# EAGLE board DashDialV3 (EAGLE 9.6.2)
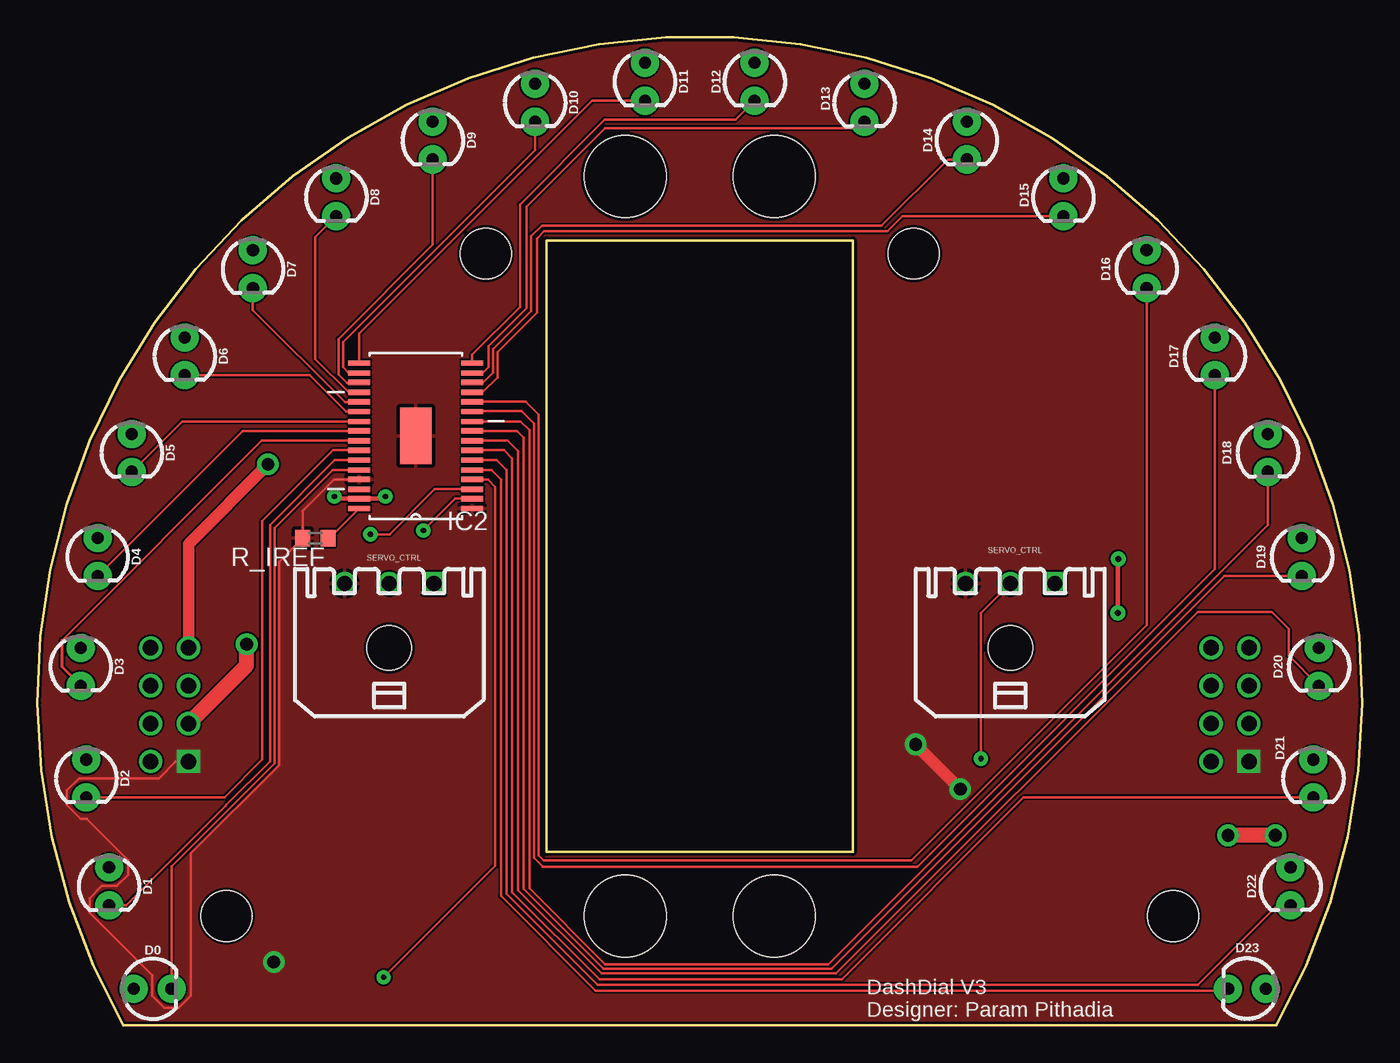
[diagram p0: board, top side]
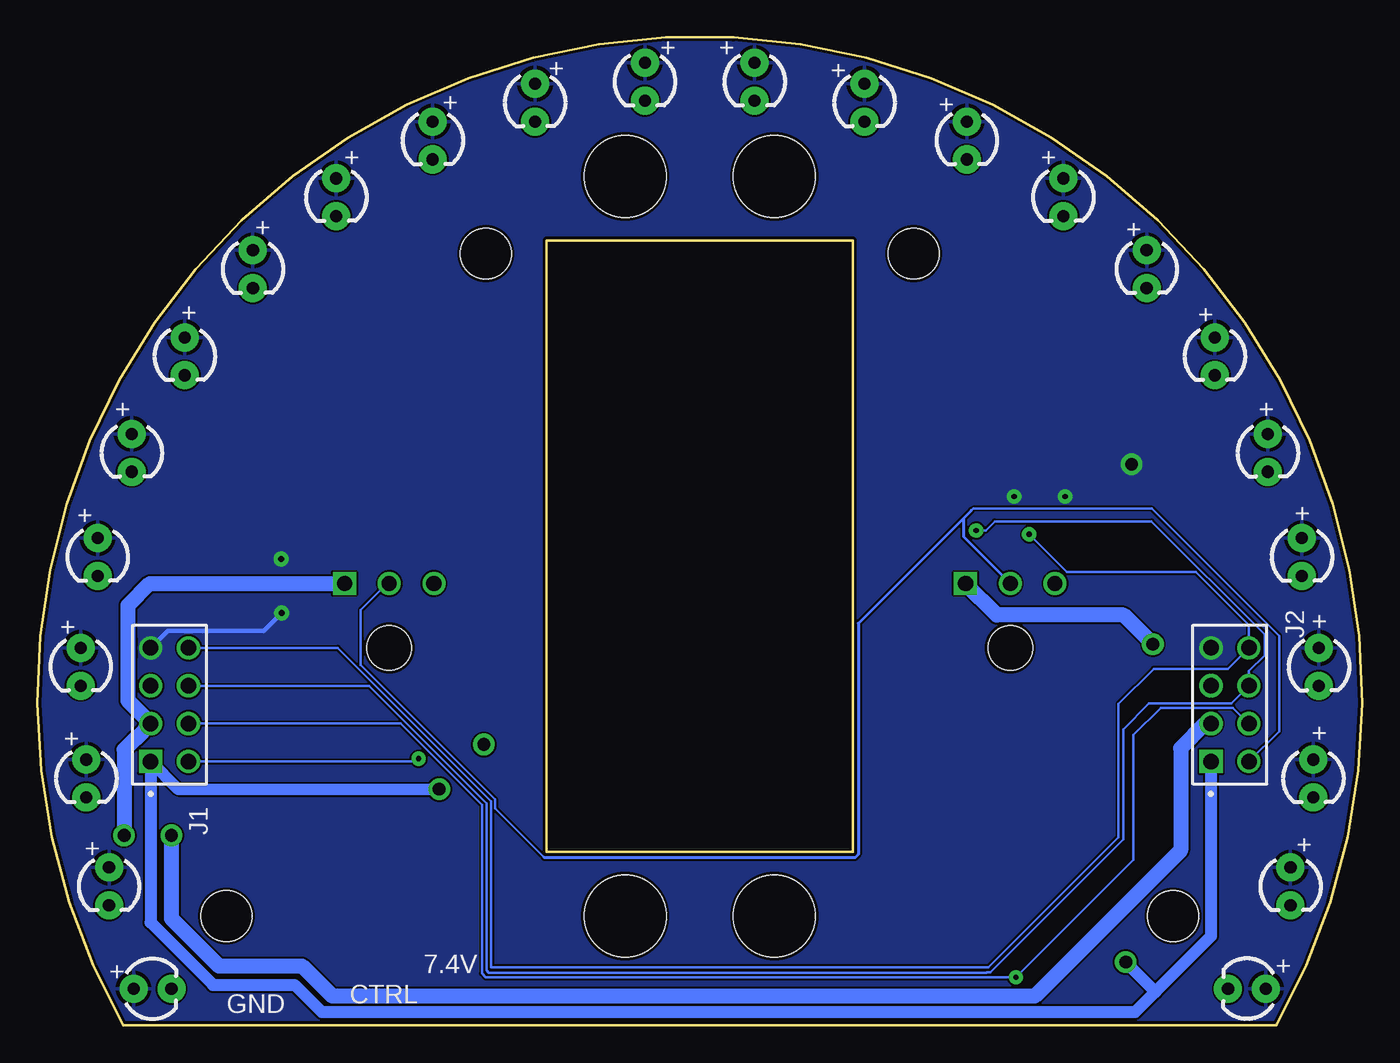
[diagram p1: board, bottom side, seen from below]

Size 88.87 x 66.28 mm. Coordinates in mm from the lower left corner, seen from the top.
Outline: 5.77,0 arc-239 83.09,0 5.77,0
Outline: 34.17,11.63 34.17,52.65 54.7,52.65 54.7,11.63 34.17,11.63
Copper layers (1*16): Top 0.035mm / dielectric 1.6mm / Bottom 0.035mm
Design rules "designrulecheck_jlcpcb_2layers": minimum track width 5mil, minimum drill 0.3mm, track to track 5mil, track to pad 0.2mm, pad to pad 5mil, via to via 10mil, smd to smd 5mil, copper to edge 0.2mm, drill to drill 0.5mm, minimum pad ring 10mil, minimum via ring 0.3mm, stop-mask expansion 4mil, vias tented up to drill 0mil, thermal gap 10mil
Holes 5.51 mm at 39.43,56.95 49.44,56.95 39.43,7.34 49.44,7.34
Holes 3.4 mm at 12.68,7.34 30.08,51.77 58.78,51.77 76.18,7.34

## Footprints (pad centres in the part's own frame; a part is rotated, then mirrored left to right if it is on the bottom)
LED_3MM = drill 0.813 pad 1.88: A -1.27,0; K 1.27,0
SOP65P810X120-33N = smd 1.473 x 0.356: 1 -3.785,4.877; 2 -3.785,4.216; 3 -3.785,3.581; 4 -3.785,2.921; 5 -3.785,2.286; 6 -3.785,1.626; 7 -3.785,0.965; 8 -3.785,0.33; 9 -3.785,-0.33; 10 -3.785,-0.965; 11 -3.785,-1.626; 12 -3.785,-2.286; 13 -3.785,-2.921; 14 -3.785,-3.581; 15 -3.785,-4.216; 16 -3.785,-4.877; 17 3.785,-4.877; 18 3.785,-4.216; 19 3.785,-3.581; 20 3.785,-2.921; 21 3.785,-2.286; 22 3.785,-1.626; 23 3.785,-0.965; 24 3.785,-0.33; 25 3.785,0.33; 26 3.785,0.965; 27 3.785,1.626; 28 3.785,2.286; 29 3.785,2.921; 30 3.785,3.581; 31 3.785,4.216; 32 3.785,4.877 | smd 2.108 x 3.81: 33 0,0
SAMTEC_ESW-104-23-L-D = drill 1.04 pad 1.39 square: 01 0,0 | drill 1.04 pad 1.39: 02 0,2.54; 03 -2.54,0; 04 -2.54,2.54; 05 -5.08,0; 06 -5.08,2.54; 07 -7.62,0; 08 -7.62,2.54
R0603 = smd 1 x 1.1: 1 -0.85,0; 2 0.85,0
43650-0300 = drill 1.02 square: P$1 3,4.32 | drill 1.02: P$2 0,4.32; P$3 -3,4.32 | hole 3: 0,0

## Placement (x,y rotation side)
D0  [LED_3MM]  7.73,2.46 0 top
D1  [LED_3MM]  4.81,9.32 270 top
D2  [LED_3MM]  3.29,16.56 270 top
D3  [LED_3MM]  2.9,24.05 270 top
D4  [LED_3MM]  4.05,31.42 270 top
D5  [LED_3MM]  6.33,38.4 270 top
D6  [LED_3MM]  9.89,44.88 270 top
D7  [LED_3MM]  14.46,50.72 270 top
D8  [LED_3MM]  20.05,55.55 270 top
D9  [LED_3MM]  26.53,59.36 270 top
D10  [LED_3MM]  33.38,61.9 270 top
D11  [LED_3MM]  40.75,63.3 270 top
D12  [LED_3MM]  48.12,63.3 270 top
D13  [LED_3MM]  55.48,61.9 270 top
D14  [LED_3MM]  62.34,59.36 270 top
D15  [LED_3MM]  68.82,55.55 270 top
D16  [LED_3MM]  74.41,50.72 270 top
D17  [LED_3MM]  78.98,44.88 270 top
D18  [LED_3MM]  82.53,38.4 270 top
D19  [LED_3MM]  84.82,31.42 270 top
D20  [LED_3MM]  85.96,24.05 270 top
D21  [LED_3MM]  85.58,16.56 270 top
D22  [LED_3MM]  84.06,9.32 270 top
D23  [LED_3MM]  81.14,2.46 180 top
IC2  TLC5952DAP  [SOP65P810X120-33N]  25.38,39.55 180 top
J1  ESW-104-23-L-D  [SAMTEC_ESW-104-23-L-D]  81.26,17.7 270 bottom
J2  ESW-104-23-L-D  [SAMTEC_ESW-104-23-L-D]  10.14,17.7 270 bottom
R_IREF  2.4k  [R0603]  18.65,32.69 180 top
SERVO  [43650-0300]  65.26,25.32 0 top
SERVO1  [43650-0300]  23.61,25.32 0 top

## Library data of the parts
D0 D1-D23 = SparkFun-LED; PROD_ID: DIO-08794
IC2 = GTOR - Active Components; ARROW_PART_NUMBER: TLC5952DAP; ARROW_PRICE-STOCK: https://www.arrow.com/en/products/tlc5952dap/texas-instruments; DESCRIPTION: 24-Channel Constant-Current LED Driver with Global Brightness and LED Open Short Detection; HEIGHT: mm; MANUFACTURER_NAME: Texas Instruments; MANUFACTURER_PART_NUMBER: TLC5952DAP; MOUSER_PART_NUMBER: 595-TLC5952DAP; MOUSER_PRICE-STOCK: https://www.mouser.co.uk/ProductDetail/Texas-Instruments/TLC5952DAP?qs=IK5e5L0zOXhuADcxoTQ%252BEg%3D%3D
J1 J2 = ESW-104-23-L-D; MANUFACTURER: Samtec Inc.; PARTREV: R; STANDARD: Manufacturer Recommendations
R_IREF = GTOR - Passive Components; SPICEPREFIX: R
SERVO SERVO1 = GTOR - Microfit Connector

## Nets
3.3V: D0.A D1.A D2.A D3.A D4.A D5.A D6.A D7.A D8.A D9.A D10.A D11.A D12.A D13.A D14.A D15.A D16.A D17.A D18.A D19.A D20.A D21.A D22.A D23.A IC2.31 J1.07 J2.07
7.4V: J1.03 J2.03 SERVO1.P$1 SERVO.P$1
GND: IC2.1 IC2.29 IC2.33 J1.01 J2.01 R_IREF.2 SERVO1.P$3 SERVO.P$3
LAT: IC2.4 J1.04 J2.04
N$31: IC2.32 R_IREF.1
OUT0: D23.K IC2.5
OUT1: D22.K IC2.6
OUT2: D21.K IC2.7
OUT3: D20.K IC2.8
OUT4: D19.K IC2.9
OUT5: D18.K IC2.10
OUT6: D17.K IC2.11
OUT7: D16.K IC2.12
OUT8: D15.K IC2.13
OUT9: D14.K IC2.14
OUT10: D13.K IC2.15
OUT11: D12.K IC2.16
OUT12: D11.K IC2.17
OUT13: D10.K IC2.18
OUT14: D9.K IC2.19
OUT15: D8.K IC2.20
OUT16: D7.K IC2.21
OUT17: D6.K IC2.22
OUT18: D5.K IC2.23
OUT19: D4.K IC2.24
OUT20: D3.K IC2.25
OUT21: D2.K IC2.26
OUT22: D1.K IC2.27
OUT23: D0.K IC2.28
SCLK: IC2.3 J1.08 J2.08
SERVO_CTRL: J1.02 J2.02 SERVO1.P$2 SERVO.P$2
SIN: IC2.2 J1.06 J2.06

## Tracks (layer width: path | path; a pad name or v marks a point on that pad's centre or on a via)
3.3V  (via drill 0.35, 0.4, 0.85)
  Top 0.305: v19.92,35.48 20.05,35.36 21.57,35.36 IC2.31 23.2,35.33 v23.35,35.48 | v72.47,27.68 72.47,31.26 v72.5,31.29
  Top 0.762: J2.07 10.14,32.31 v15.48,37.64
  Bottom 0.305: v72.47,27.68 73.69,26.46 80.13,26.46 J1.07
  pour Bottom: -10.05,68.63 -10.05,9.45 4.17,-4.78 86.98,-4.78 89.9,-1.85 101.84,10.08 101.84,69.27 101.2,68.63
  pour Bottom (no thermals): 9.13,26.34 9.13,24.31 11.16,24.31 11.16,26.34
  pour Bottom (no thermals): 80.25,26.34 80.25,24.31 82.28,24.31 82.28,26.34
7.4V  (via drill 0.85)
  Top 1.016: v83.04,12.75 v79.88,12.75 | J2.03 14.04,24.14 v14.04,25.58
  Bottom 0.203: J1.03 81.26,20.26
  Bottom 1.016: J2.03 10.52,20.24 12.18,18.59 12.18,11.74 21.96,1.96 69.07,1.96 71.1,3.99 76.69,3.99 79.88,7.17 v79.88,12.75 | 81.26,20.26 82.78,21.77 82.78,28.19 81.32,29.64 SERVO.P$1 | J1.03 82.32,19.19 82.34,19.19 83.04,18.49 v83.04,12.75 | v14.04,25.58 16,27.53 24.52,27.53 26.61,29.62 SERVO1.P$1
GND  (via drill 0.85)
  Top 0.152: IC2.29 19.92,36.63 17.8,34.51 R_IREF.2 16.21,31.1 16.21,17.45 10.3,11.53 10.3,1.98 9.48,1.17 8.52,1.17 7.71,1.98 7.71,3.38 3.51,7.57 3.51,8.54 4.33,9.35 5.34,9.35 6.1,10.11 6.1,11.08 3.31,13.87 2.93,13.87 1.99,14.81 1.99,15.77 2.8,16.59 8.17,16.59 9.28,17.7 J2.01
  Top 0.762: v61.91,15.85 v58.91,18.85
  Bottom 0.762: v15.86,4.24 13.87,2.25 | J1.01 79.41,15.85 v61.91,15.85
  Bottom 0.813: J2.01 10.14,5.98 13.87,2.25 15.24,0.88 69.78,0.88 71.61,2.72 77.07,2.72 81.26,6.91 J1.01
  pour Top (rank 2): -13.86,71.3 -13.86,8.94 3.16,-8.08 88.76,-8.08 105.52,8.69 105.52,71.81 105.01,71.3
  pour Top (no thermals): 80.25,18.59 80.25,16.69 82.28,16.69 82.28,18.72 80.25,18.72
  pour Top (no thermals): 9.13,18.59 9.13,16.69 11.16,16.69 11.16,18.72 9.13,18.72
LAT  (via drill 0.35)
  Top 0.152: IC2.4 29.19,36.61 30.23,36.61 30.72,36.12 30.72,10.72 v23.22,3.23
  Bottom 0.152: J1.04 64.5,20.24 59.04,14.78 59.04,3.48 58.78,3.23 v23.22,3.23 15.35,11.1 15.35,19.48 13.52,21.31 8.67,21.31 J2.04
N$31
  Top 0.152: IC2.32 19.62,32.69 R_IREF.1
OUT0
  Top 0.152: D23.K 79.74,2.34 37.45,2.34 31.1,8.69 31.1,36.63 30.46,37.26 IC2.5
OUT1
  Top 0.152: D22.K 83.17,8.05 77.83,2.72 37.58,2.72 31.48,8.81 31.48,37.26 30.82,37.92 IC2.6
OUT2
  Top 0.152: D21.K 66.15,15.29 53.96,3.1 37.7,3.1 31.86,8.94 31.86,38.02 31.3,38.58 IC2.7
OUT3
  Top 0.152: D20.K 83.93,24.82 83.93,26.59 82.79,27.74 77.83,27.74 53.58,3.48 37.83,3.48 32.24,9.07 32.24,38.53 31.56,39.22 IC2.8
OUT4
  Top 0.152: D19.K 79.61,30.15 53.27,3.8 37.96,3.8 32.62,9.15 32.62,39.42 32.17,39.88 IC2.9
OUT5
  Top 0.152: D18.K 82.53,33.58 53.06,4.11 38.09,4.11 33,9.2 33,39.93 32.42,40.51 IC2.10
OUT6
  Top 0.152: D17.K 78.98,30.61 59.02,10.65 33.89,10.65 33.89,10.66 33.31,11.24 33.31,40.38 32.5,41.2 29.19,41.2 IC2.11
OUT7
  Top 0.152: D16.K 74.41,26.85 58.64,11.08 33.94,11.08 33.62,11.4 33.62,40.96 32.75,41.83 IC2.12
OUT8
  Top 0.152: D15.K 58.02,54.28 57.01,53.26 34,53.26 33.51,52.77 33.51,47.8 30.87,45.16 30.87,43.47 29.87,42.47 IC2.13
OUT9
  Top 0.152: D14.K 61.07,58.09 56.63,53.64 33.84,53.64 33.13,52.93 33.13,47.93 30.57,45.36 30.57,43.8 29.87,43.1 29.19,43.1 IC2.14
OUT10
  Top 0.152: D13.K 55.03,60.18 38.09,60.18 32.83,54.91 32.83,48.13 30.26,45.57 30.26,44.15 29.87,43.76 IC2.15
OUT11
  Top 0.152: D12.K 46.85,60.76 38.06,60.76 32.37,55.06 32.37,48.18 29.17,44.98 IC2.16
OUT12
  Top 0.152: D11.K 37.19,62.03 21.57,46.41 21.57,44.45 IC2.17
OUT13
  Top 0.152: D10.K 33.38,58.72 20.51,45.85 20.51,44.15 20.89,43.76 IC2.18
OUT14
  Top 0.152: D9.K 26.53,52.37 20.2,46.05 20.2,43.67 20.77,43.1 21.57,43.1 IC2.19
OUT15
  Top 0.152: D8.K 18.65,52.88 18.65,44.71 20.89,42.47 IC2.20
OUT16
  Top 0.152: IC2.21 21.57,41.81 20.64,41.81 14.46,47.99 D7.K
OUT17
  Top 0.152: D6.K 18.27,43.61 20.71,41.17 IC2.22
OUT18
  Top 0.152: D5.K 9.71,40.51 IC2.23
OUT19
  Top 0.152: D4.K 13.78,39.88 IC2.24
OUT20
  Top 0.152: 1.66,25.84 15.04,39.22 IC2.25
  Top 0.203: 1.66,25.84 1.66,24.05 2.9,22.81 D3.K
OUT21
  Top 0.152: D2.K 12.56,15.29 15.1,17.83 15.1,33.83 19.85,38.58 IC2.26
OUT22
  Top 0.152: D1.K 5.95,8.05 12.62,14.72 12.68,14.78 15.6,17.7 15.6,33.58 19.95,37.92 IC2.27
OUT23
  Top 0.152: D0.K 9,10.67 15.91,17.58 15.91,33.38 19.8,37.26 IC2.28
SCLK  (via drill 0.35)
  Top 0.152: IC2.3 26.65,35.97 23.63,32.94 v22.34,32.94
  Bottom 0.152: J1.08 68.72,25.32 58.43,15.04 58.43,3.89 25.06,3.89 16.34,12.61 16.34,21.57 13.99,23.92 9.01,23.92 J2.08 7.6,26.85 11.16,30.4 19.8,30.4 v22.34,32.94
SERVO_CTRL  (via drill 0.35)
  Top 0.152: v63.3,17.89 63.3,27.68 SERVO.P$2
  Bottom 0.152: J2.02 5.57,19.74 5.57,26.14 14.1,34.67 26.09,34.67 26.22,34.54 26.73,34.03 | J1.02 63.48,17.7 v63.3,17.89 | SERVO.P$2 65.39,29.64 67.17,27.86 67.17,24.17 58.15,15.15 58.15,14.55 54.9,11.3
  Bottom 0.203: SERVO1.P$2 26.73,32.76 26.73,34.03 | 54.9,11.3 54.85,11.26 34.02,11.26 33.79,11.48 33.79,26.97 26.22,34.54
SIN  (via drill 0.35)
  Top 0.152: v25.89,33.2 28.03,35.33 IC2.2
  Bottom 0.152: J1.06 66.61,22.78 58.73,14.91 58.73,3.68 58.58,3.53 25.21,3.53 25.17,3.57 24.95,3.57 16.04,12.48 16.04,19.86 14.31,21.59 8.8,21.59 J2.06 7.6,23.77 6.54,24.83 6.54,26.22 14.13,33.8 24.65,33.8 25.26,33.2 v25.89,33.2

## Text on the board
tPlace: DashDial V3 / Designer: Param Pithadia
tNames: SERVO_CTRL | SERVO_CTRL
bNames: + | + | + | + | + | + | + | + | + | + | + | + | + | + | + | + | + | + | + | + | + | + | 7.4V | + | + | CTRL | GND